# EAGLE board atmega2560test1 (EAGLE 6.1)
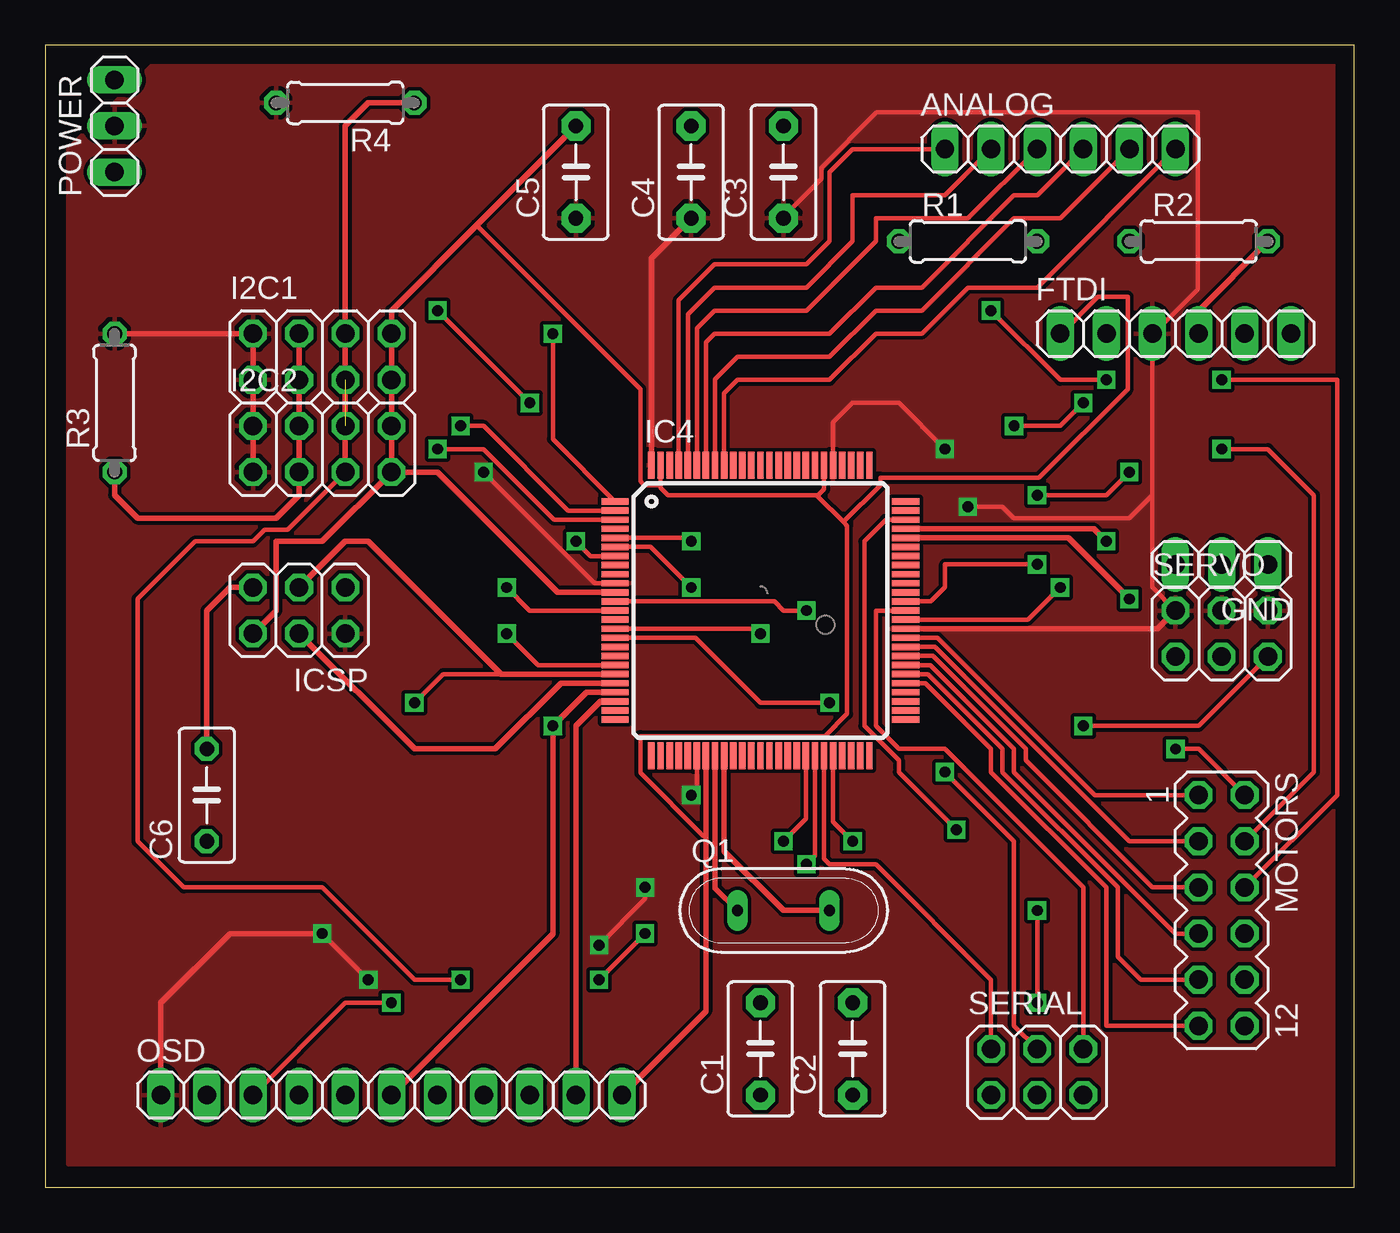
[diagram p0: board, top side]
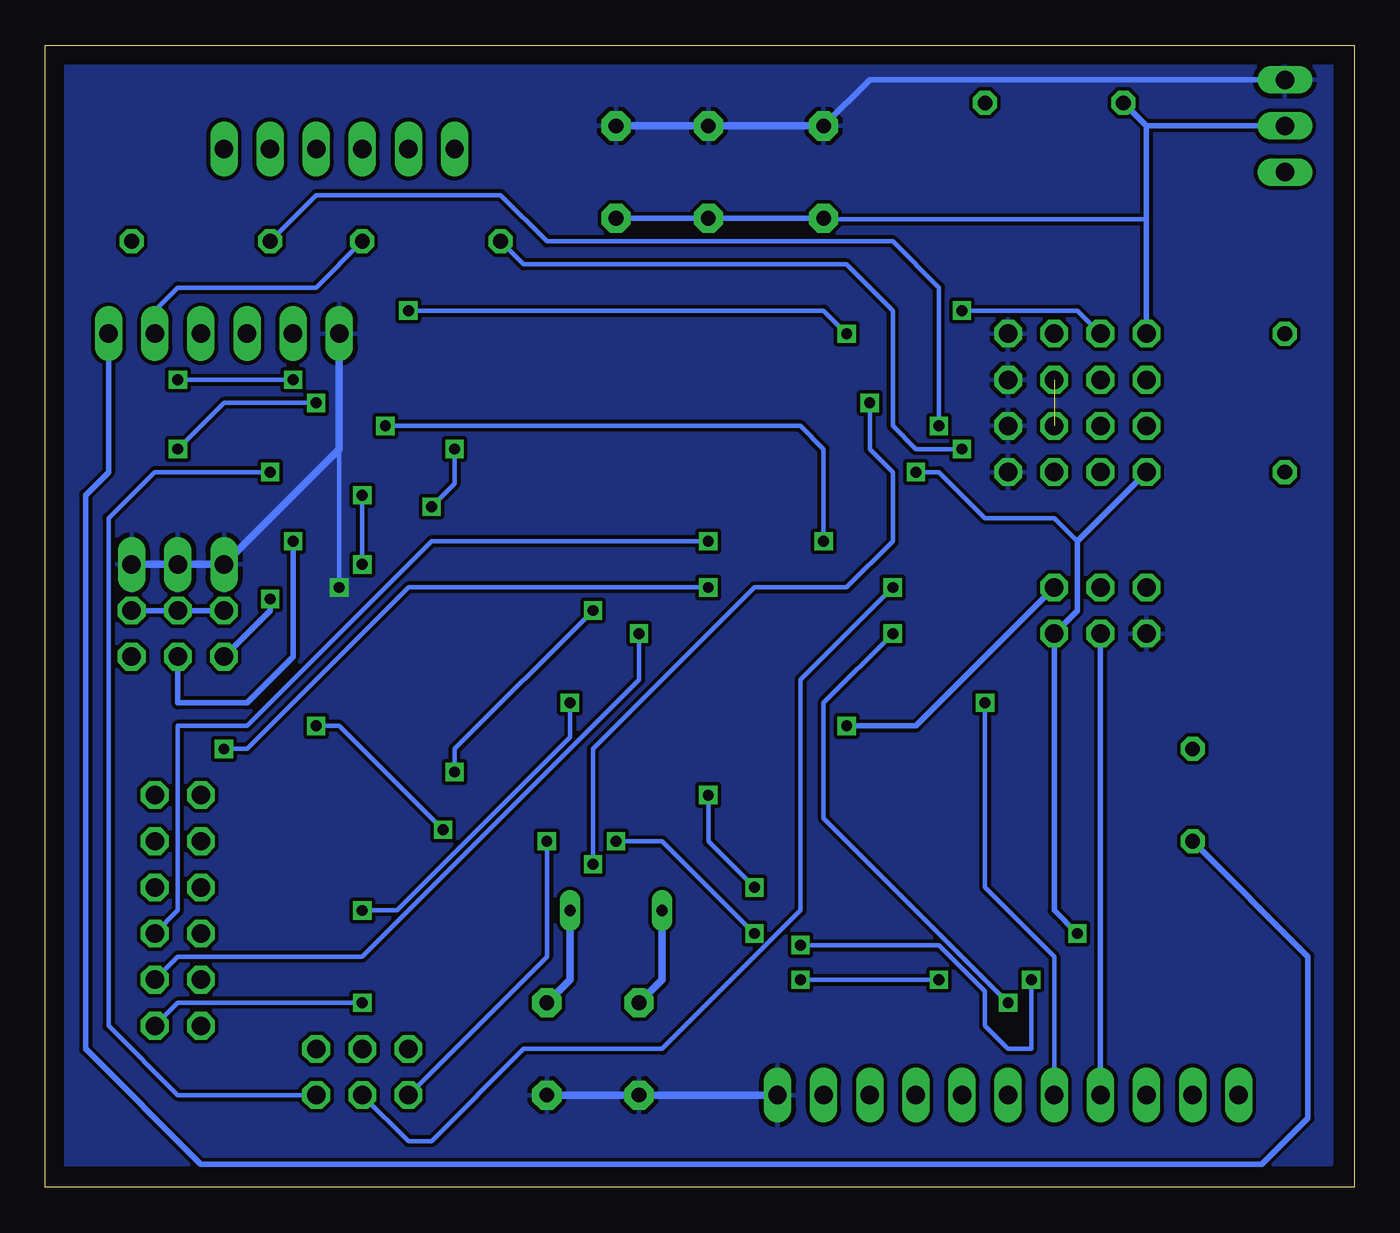
[diagram p1: board, bottom side, seen from below]

Size 72.06 x 62.86 mm. Coordinates in mm from the lower left corner, seen from the top.
Outline: 0,0 72.06,0 72.06,62.86 0,62.86 0,0
Copper layers (1*16): Top 0.035mm / dielectric 1.5mm / Bottom 0.035mm
Design rules: minimum track width 10mil, minimum drill 24mil, track to track 8mil, track to pad 8mil, pad to pad 8mil, via to via 8mil, smd to smd 8mil, copper to edge 40mil, drill to drill 8mil, minimum pad ring 10mil, minimum via ring 8mil, stop-mask expansion 4mil, vias tented up to drill 0mil, thermal gap 10mil

## Footprints (pad centres in the part's own frame; a part is rotated, then mirrored left to right if it is on the bottom)
1X06 = drill 1.016 long: 1 -6.35,0; 2 -3.81,0; 3 -1.27,0; 4 1.27,0; 5 3.81,0; 6 6.35,0
C5B3.5 = drill 0.813 pad 1.6 octagon: 1 -2.54,0; 2 2.54,0
C050-030X075 = drill 0.813 octagon: 1 -2.54,0; 2 2.54,0
1X03 = drill 1.016 long: 1 -2.54,0; 2 0,0; 3 2.54,0
2X04 = drill 1.016 octagon: 1 -3.81,-1.27; 2 -3.81,1.27; 3 -1.27,-1.27; 4 -1.27,1.27; 5 1.27,-1.27; 6 1.27,1.27; 7 3.81,-1.27; 8 3.81,1.27
TQFP100 = smd 1.5 x 0.35: 1 -8,6; 2 -8,5.5; 3 -8,5; 4 -8,4.5; 5 -8,4; 6 -8,3.5; 7 -8,3; 8 -8,2.5; 9 -8,2; 10 -8,1.5; 11 -8,1; 12 -8,0.5; 13 -8,0; 14 -8,-0.5; 15 -8,-1; 16 -8,-1.5; 17 -8,-2; 18 -8,-2.5; 19 -8,-3; 20 -8,-3.5; 21 -8,-4; 22 -8,-4.5; 23 -8,-5; 24 -8,-5.5; 25 -8,-6; 51 8,-6; 52 8,-5.5; 53 8,-5; 54 8,-4.5; 55 8,-4; 56 8,-3.5; 57 8,-3; 58 8,-2.5; 59 8,-2; 60 8,-1.5; 61 8,-1; 62 8,-0.5; 63 8,0; 64 8,0.5; 65 8,1; 66 8,1.5; 67 8,2; 68 8,2.5; 69 8,3; 70 8,3.5; 71 8,4; 72 8,4.5; 73 8,5; 74 8,5.5; 75 8,6 | smd 0.35 x 1.5: 26 -6,-8; 27 -5.5,-8; 28 -5,-8; 29 -4.5,-8; 30 -4,-8; 31 -3.5,-8; 32 -3,-8; 33 -2.5,-8; 34 -2,-8; 35 -1.5,-8; 36 -1,-8; 37 -0.5,-8; 38 0,-8; 39 0.5,-8; 40 1,-8; 41 1.5,-8; 42 2,-8; 43 2.5,-8; 44 3,-8; 45 3.5,-8; 46 4,-8; 47 4.5,-8; 48 5,-8; 49 5.5,-8; 50 6,-8; 76 6,8; 77 5.5,8; 78 5,8; 79 4.5,8; 80 4,8; 81 3.5,8; 82 3,8; 83 2.5,8; 84 2,8; 85 1.5,8; 86 1,8; 87 0.5,8; 88 0,8; 89 -0.5,8; 90 -1,8; 91 -1.5,8; 92 -2,8; 93 -2.5,8; 94 -3,8; 95 -3.5,8; 96 -4,8; 97 -4.5,8; 98 -5,8; 99 -5.5,8; 100 -6,8
2X03 = drill 1.016 octagon: 1 -2.54,-1.27; 2 -2.54,1.27; 3 0,-1.27; 4 0,1.27; 5 2.54,-1.27; 6 2.54,1.27
MA06-2 = drill 1.016 octagon: 1 -6.35,-1.27; 2 -6.35,1.27; 3 -3.81,-1.27; 4 -3.81,1.27; 5 -1.27,-1.27; 6 -1.27,1.27; 7 1.27,-1.27; 8 1.27,1.27; 9 3.81,-1.27; 10 3.81,1.27; 11 6.35,-1.27; 12 6.35,1.27
1X11 = drill 1.016 long: 1 -12.7,0; 2 -10.16,0; 3 -7.62,0; 4 -5.08,0; 5 -2.54,0; 6 0,0; 7 2.54,0; 8 5.08,0; 9 7.62,0; 10 10.16,0; 11 12.7,0
QS = drill 0.61 long: 1 -2.54,0; 2 2.54,0
0207/7 = drill 0.813 octagon: 1 -3.81,0; 2 3.81,0

## Placement (x,y rotation side)
ANALOG  [1X06]  55.88,57.15 0 top
C1  [C5B3.5]  39.37,7.62 90 top
C2  [C5B3.5]  44.45,7.62 90 top
C3  100n  [C5B3.5]  40.64,55.88 90 top
C4  100n  [C5B3.5]  35.56,55.88 90 top
C5  100n  [C5B3.5]  29.21,55.88 90 top
C6  100n  [C050-030X075]  8.89,21.59 90 top
FTDI  [1X06]  62.23,46.99 0 top
GND  [1X03]  64.77,34.29 180 top
I2C1  [2X04]  15.24,45.72 0 top
I2C2  [2X04]  15.24,40.64 0 top
IC4  ATMEGA2560-16AU  [TQFP100]  39.37,31.75 0 top
ICSP  [2X03]  13.97,31.75 180 top
MOTORS  [MA06-2]  64.77,15.24 270 top
OSD  [1X11]  19.05,5.08 0 top
POWER  [1X03]  3.81,58.42 90 top
Q1  16MHz  [QS]  40.64,15.24 0 top
R1  1k  [0207/7]  50.8,52.07 0 top
R2  1k  [0207/7]  63.5,52.07 0 top
R3  10k  [0207/7]  3.81,43.18 90 top
R4  10k  [0207/7]  16.51,59.69 180 top
SERIAL  [2X03]  54.61,6.35 0 top
SERVO  [2X03]  64.77,30.48 0 top

## Library data of the parts
ANALOG FTDI GND I2C1 I2C2 ICSP OSD POWER SERIAL SERVO = pinhead
C1-C5 = capacitor-wima
C6 = rcl
IC4 = atmel-2005
MOTORS = con-lstb; OC_FARNELL: unknown; OC_NEWARK: unknown
Q1 = special
R1-R4 = resistor

## Nets
+5V: C3.1 C4.1 C5.1 FTDI.3 I2C1.1 I2C1.2 I2C2.1 I2C2.2 IC4.10 IC4.31 IC4.61 IC4.80 IC4.100 ICSP.2 OSD.1 POWER.2 R3.2 R4.2 SERVO.2 SERVO.4 SERVO.6
+12V: POWER.1
A0: ANALOG.1 IC4.97
A1: ANALOG.2 IC4.96
A2: ANALOG.3 IC4.95
A3: ANALOG.4 IC4.94
A4: ANALOG.5 IC4.93
A5: ANALOG.6 IC4.92
CS: IC4.19 OSD.3
CTS: FTDI.2
D2: IC4.6 MOTORS.2
D3: IC4.7 MOTORS.4
D4: IC4.1 MOTORS.6
D5: IC4.5 MOTORS.8
D6: IC4.15 MOTORS.10
D7: IC4.16 MOTORS.12
D10-VSYNC: IC4.23 OSD.10
D28: IC4.72 SERVO.3
D29: IC4.71 SERVO.1
D30: IC4.60 MOTORS.1
D31: IC4.59 MOTORS.3
D32: IC4.58 MOTORS.5
D33: IC4.57 MOTORS.7
D34: IC4.56 MOTORS.9
D35: IC4.55 MOTORS.11
DTR: C6.1 FTDI.6
FTDI-RX: FTDI.4 R2.2
FTDI-TX: FTDI.5 R1.2
GND: C1.1 C2.1 C3.2 C4.2 C5.2 FTDI.1 GND.1 GND.2 GND.3 I2C1.7 I2C1.8 I2C2.7 I2C2.8 IC4.11 IC4.32 IC4.62 IC4.81 IC4.99 ICSP.6 OSD.11 POWER.3
I2C_SCL: I2C1.5 I2C1.6 I2C2.5 I2C2.6 IC4.43 R4.1
I2C_SDA: I2C1.3 I2C1.4 I2C2.3 I2C2.4 IC4.44 R3.1
MISO: IC4.22 ICSP.1 OSD.6
MOSI: IC4.21 ICSP.4 OSD.4
N$1: C1.2 IC4.33 Q1.1
N$2: C2.2 IC4.34 Q1.2
N$3: IC4.2 R2.1
N$4: IC4.3 R1.1
N$5: IC4.73 SERVO.5
PD4: IC4.47
PD5: IC4.48
PD6: IC4.49
PD7: IC4.50
RESET: C6.2 ICSP.5
RXD1: IC4.45 SERIAL.2
RXD2: IC4.12 SERIAL.4
RXD3: IC4.63 SERIAL.6
SCK: IC4.20 ICSP.3 OSD.5
TXD1: IC4.46 SERIAL.1
TXD2: IC4.13 SERIAL.3
TXD3: IC4.64 SERIAL.5

## Tracks (layer width: path | path; a pad name or v marks a point on that pad's centre or on a via)
+5V  (via drill 0.6)
  Top 0.254: SERVO.2 60.96,33.02 60.96,38.1 | 60.96,38.1 FTDI.3 61.01,46.99 63.45,49.43 63.45,59.18 45.77,59.18 42.72,56.13 42.72,55.52 40.69,53.49 C3.1 | IC4.10 30.25,33.25 v24.13,39.37 | IC4.80 43.37,42.1 44.45,43.18 46.99,43.18 v49.53,40.64 | v50.8,37.46 52.7,37.46 53.34,36.83 59.69,36.83 60.96,38.1 | IC4.31 35.87,21.9 v35.56,21.59 | v33.02,16.51 33.02,15.87 v30.48,13.33 | v17.78,11.43 v15.24,13.97
  Top 0.305: I2C2.1 I2C1.1 I2C1.2 R3.2 | IC4.61 61.23,30.75 SERVO.2 | v15.24,13.97 10.16,13.97 6.35,10.16 OSD.1 | IC4.100 33.37,51.15 C4.1
  Bottom 0.254: v24.13,39.37 22.86,39.37 20.32,36.83 16.51,36.83 15.24,35.56 | 11.43,53.29 29.11,53.29 C5.1 | v49.53,40.64 49.53,38.73 v50.8,37.46 | v35.56,21.59 35.56,19.05 v33.02,16.51 | v30.48,13.33 22.86,13.33 20.32,10.79 20.32,8.89 19.05,7.62 17.78,7.62 v17.78,11.43
  Bottom 0.305: POWER.2 11.43,58.42 | 11.43,58.42 R4.2 | C5.1 C4.1 C3.1 | 11.43,58.42 11.43,53.29 I2C1.2 | SERVO.2 SERVO.4 SERVO.6 | v15.24,13.97 16.51,15.24 ICSP.2 15.24,31.75 15.24,35.56 I2C2.1
  pour Top: 1.27,1.27 1.27,55.88 1.27,57.15 6.35,62.23 71.12,62.23 71.12,1.27
A0
  Top 0.254: IC4.97 34.87,48.84 36.83,50.8 41.91,50.8 43.18,52.07 43.18,55.88 44.45,57.15 ANALOG.1
A1
  Top 0.254: IC4.96 35.37,48.07 36.83,49.53 41.91,49.53 44.45,52.07 44.45,54.61 49.53,54.61 ANALOG.2
A2
  Top 0.254: IC4.95 35.87,47.3 36.83,48.26 41.91,48.26 45.72,52.07 45.72,53.34 50.8,53.34 ANALOG.3
A3
  Top 0.254: IC4.94 36.37,46.53 36.83,46.99 43.18,46.99 45.72,49.53 48.26,49.53 53.34,54.61 54.61,54.61 ANALOG.4
A4
  Top 0.254: IC4.93 36.87,44.49 38.1,45.72 43.18,45.72 45.72,48.26 48.26,48.26 53.34,53.34 55.88,53.34 ANALOG.5
A5
  Top 0.254: ANALOG.6 54.61,49.53 50.8,49.53 48.26,46.99 45.72,46.99 43.18,44.45 38.1,44.45 37.37,43.72 IC4.92
CS  (via drill 0.6)
  Top 0.254: IC4.19 27.13,28.75 v25.4,30.48 | v19.05,10.16 16.51,10.16 OSD.3
  Bottom 0.254: v25.4,30.48 29.21,26.67 29.21,20.32 v19.05,10.16
D2  (via drill 0.6)
  Top 0.254: IC4.6 33.33,35.25 v35.56,33.02 | v62.23,24.13 63.5,24.13 MOTORS.2
  Bottom 0.254: v35.56,33.02 52.07,33.02 60.96,24.13 v62.23,24.13
D3  (via drill 0.6)
  Top 0.254: IC4.7 30.02,34.75 v29.21,35.56 | v53.34,41.91 55.88,41.91 v57.15,43.18 | v64.77,40.64 67.31,40.64 69.85,38.1 69.85,22.86 MOTORS.4
  Bottom 0.254: v29.21,35.56 29.21,40.64 30.48,41.91 v53.34,41.91 | v57.15,43.18 62.23,43.18 v64.77,40.64
D4  (via drill 0.6)
  Top 0.254: MOTORS.6 71.12,21.59 71.12,44.45 v64.77,44.45 | v58.42,44.45 55.88,44.45 v52.07,48.26 | v27.94,46.99 27.94,41.18 IC4.1
  Bottom 0.254: v64.77,44.45 v58.42,44.45 | v52.07,48.26 29.21,48.26 v27.94,46.99
D5  (via drill 0.6)
  Top 0.254: IC4.5 35.37,35.75 v35.56,35.56
  Bottom 0.254: v35.56,35.56 50.8,35.56 60.96,25.4 64.77,25.4 64.77,15.24 MOTORS.8
D6  (via drill 0.6)
  Top 0.254: IC4.15 39.1,30.75 v39.37,30.48
  Bottom 0.254: v39.37,30.48 39.37,27.94 54.61,12.7 64.77,12.7 MOTORS.10
D7  (via drill 0.6)
  Top 0.254: IC4.16 35.79,30.25 39.37,26.67 v43.18,26.67 | v54.61,15.24 v54.61,10.16
  Bottom 0.254: v54.61,10.16 64.77,10.16 MOTORS.12 | v43.18,26.67 43.18,24.77 52.7,15.24 v54.61,15.24
D10-VSYNC
  Top 0.305: IC4.23 30.56,26.75 29.21,25.4 OSD.10
D28  (via drill 0.6)
  Top 0.305: IC4.72 57.73,36.25 v58.42,35.56
  Bottom 0.305: v58.42,35.56 58.42,29.21 60.96,26.67 64.77,26.67 SERVO.3
D29  (via drill 0.6)
  Top 0.305: IC4.71 56.33,35.75 v59.69,32.38
  Bottom 0.305: v59.69,32.38 59.69,31.75 SERVO.1
D30
  Top 0.254: IC4.60 49.12,30.25 57.78,21.59 MOTORS.1
D31
  Top 0.254: IC4.59 48.99,29.75 59.69,19.05 MOTORS.3
D32
  Top 0.254: IC4.58 48.85,29.25 53.98,24.13 53.98,23.5 60.96,16.51 MOTORS.5
D33
  Top 0.254: IC4.57 48.72,28.75 53.34,24.13 53.34,22.86 62.23,13.97 MOTORS.7
D34
  Top 0.254: IC4.56 48.59,28.25 52.7,24.13 52.7,22.86 59.05,16.51 59.05,12.7 60.33,11.43 MOTORS.9
D35
  Top 0.254: IC4.55 48.45,27.75 52.07,24.13 52.07,22.86 58.42,16.51 58.42,8.89 MOTORS.11
DTR
  Bottom 0.305: FTDI.6 68.58,39.37 69.85,38.1 69.85,7.62 63.5,1.27 5.08,1.27 2.54,3.81 2.54,12.7 C6.1
FTDI-RX
  Top 0.305: FTDI.4 63.5,48.26 R2.2
FTDI-TX
  Bottom 0.254: FTDI.5 66.04,48.26 64.77,49.53 57.15,49.53 R1.2
GND  (via drill 0.6)
  Top 0.254: IC4.99 33.87,38.66 | 33.87,38.66 33.87,38.52 34.29,38.1 42.52,38.1 | IC4.81 42.87,38.42 42.55,38.1 42.52,38.1 | IC4.62 54.11,31.25 v55.88,33.02 | 19.15,41.91 I2C2.8 | 19.05,44.35 19.15,44.35 I2C1.7 | 23.75,52.96 32.77,43.94 32.77,38.86 32.97,38.66 33.87,38.66 | 43.94,36.63 44.14,36.42 44.14,26.06 42.93,24.84 32.77,24.84 32.77,22.81 36.22,19.36 36.37,19.36 | 43.94,36.63 42.52,38.05 42.52,38.1 | 43.94,36.63 45.97,38.66 45.97,39.06 54.71,39.06 59.59,43.94 59.59,49.02 57.96,49.02 55.93,46.99 FTDI.1
  Top 0.305: I2C2.7 I2C2.8 19.05,44.35 I2C1.7 I2C1.8 19.05,48.26 23.75,52.96 C5.2 | IC4.32 36.37,19.36 36.37,9.7 OSD.11 | IC4.11 28.21,32.75 21.59,39.37 I2C2.7 | ICSP.6 12.7,31.75 12.7,35.56 15.24,35.56 I2C2.7
  Bottom 0.254: v55.88,33.02 55.88,40.64
  Bottom 0.305: POWER.3 26.67,60.96 C5.2
  Bottom 0.406: C5.2 C4.2 C3.2 | FTDI.1 55.88,40.64 GND.3 GND.2 GND.1 | C2.1 C1.1 OSD.11
  pour Bottom: 1.27,1.27 1.27,62.23 71.12,62.23 71.12,1.27
I2C_SCL  (via drill 0.6)  (1 unrouted)
  Top 0.254: IC4.43 41.87,20.28 v40.64,19.05 | v33.02,13.97 v30.48,11.43 | v22.86,11.43 20.32,11.43 15.24,16.51 7.62,16.51 5.08,19.05 5.08,32.38 8.25,35.56 11.43,35.56 12.06,36.2 13.34,36.2 I2C2.5
  Top 0.305: I2C2.5 I2C1.5 I2C1.6 16.51,58.42 17.78,59.69 R4.1
  Bottom 0.254: v40.64,19.05 38.1,19.05 v33.02,13.97 | v30.48,11.43 v22.86,11.43
I2C_SDA  (via drill 0.6)
  Top 0.254: IC4.44 42.37,18.24 v41.91,17.78 | v26.67,43.18 v21.59,48.26 | 14.07,41.91 I2C2.4 | 13.97,44.35 14.07,44.35 I2C1.3
  Top 0.305: I2C1.4 I2C1.3 13.97,44.35 I2C2.4 I2C2.3 13.97,38.1 12.7,36.83 5.08,36.83 3.81,38.1 R3.1
  Bottom 0.254: v41.91,17.78 41.91,24.13 33.02,33.02 27.94,33.02 25.4,35.56 25.4,39.37 26.67,40.64 v26.67,43.18 | v21.59,48.26 15.24,48.26 I2C1.4
MISO  (via drill 0.6)
  Top 0.305: IC4.22 29.79,27.25 v27.94,25.4 27.94,13.97 OSD.6
  Bottom 0.305: v27.94,25.4 24.13,25.4 ICSP.1
MOSI
  Top 0.305: IC4.21 28.38,27.75 24.77,24.13 20.32,24.13 ICSP.4
  Bottom 0.305: ICSP.4 OSD.4
N$1
  Top 0.305: IC4.33 36.87,16.47 Q1.1
  Bottom 0.406: Q1.1 38.1,11.43 C1.2
N$2
  Top 0.305: IC4.34 37.37,18.51 40.64,15.24 Q1.2
  Bottom 0.406: Q1.2 43.18,11.43 C2.2
N$3  (via drill 0.6)
  Top 0.254: IC4.2 28.79,37.25 24.13,41.91 v22.86,41.91
  Bottom 0.254: v22.86,41.91 22.86,49.53 25.4,52.07 44.45,52.07 46.99,54.61 57.15,54.61 R2.1
N$4  (via drill 0.6)
  Top 0.254: IC4.3 28.02,36.75 24.13,40.64 v21.59,40.64
  Bottom 0.254: v21.59,40.64 24.13,40.64 25.4,41.91 25.4,48.26 27.94,50.8 45.72,50.8 R1.1
N$5  (via drill 0.6)
  Top 0.254: v57.15,25.4 63.5,25.4 SERVO.5 | IC4.73 46.27,36.75 45.09,35.56 45.09,25.4 46.99,23.5 46.99,22.86 v50.16,19.69
  Bottom 0.254: v57.15,25.4 55.88,25.4 v50.16,19.69
RESET
  Top 0.305: ICSP.5 10.16,33.02 8.89,31.75 C6.2
RXD1
  Top 0.254: IC4.45 42.87,18.09 43.18,17.78 45.72,17.78 52.07,11.43 SERIAL.2
RXD2  (via drill 0.6)
  Top 0.254: SERIAL.4 53.34,8.89 53.34,19.05 v49.53,22.86 | v41.91,31.75 40.64,31.75 40.14,32.25 IC4.12
  Bottom 0.254: v49.53,22.86 49.53,24.13 v41.91,31.75
RXD3
  Top 0.254: IC4.63 45.72,31.75 45.72,25.4 46.99,24.13 49.53,24.13 57.15,16.51 SERIAL.6
SCK  (via drill 0.6)
  Top 0.254: 25.09,28.25 21.9,28.25 v20.32,26.67
  Top 0.305: IC4.20 25.09,28.25 17.78,35.56 16.51,35.56 ICSP.3
  Bottom 0.254: v20.32,26.67 20.32,16.51 16.51,12.7 OSD.5
TXD1  (via drill 0.6)
  Top 0.254: IC4.46 43.37,20.13 v44.45,19.05
  Bottom 0.254: v44.45,19.05 44.45,12.7 SERIAL.1
TXD2  (via drill 0.6)
  Top 0.254: IC4.13 26.67,31.75 v25.4,33.02
  Bottom 0.254: v25.4,33.02 30.48,27.94 30.48,15.24 38.1,7.62 45.72,7.62 50.8,2.54 52.07,2.54 SERIAL.3
TXD3  (via drill 0.6)
  Top 0.254: IC4.64 48.76,32.25 49.53,33.02 49.53,34.29 v54.61,34.29 | v54.61,38.1 58.42,38.1 v59.69,39.37
  Bottom 0.254: v54.61,34.29 v54.61,38.1 | v59.69,39.37 66.04,39.37 68.58,36.83 68.58,8.89 64.77,5.08 SERIAL.5